# EAGLE board HB-OU-MP3-LED_V1.2 (EAGLE 9.4.2)
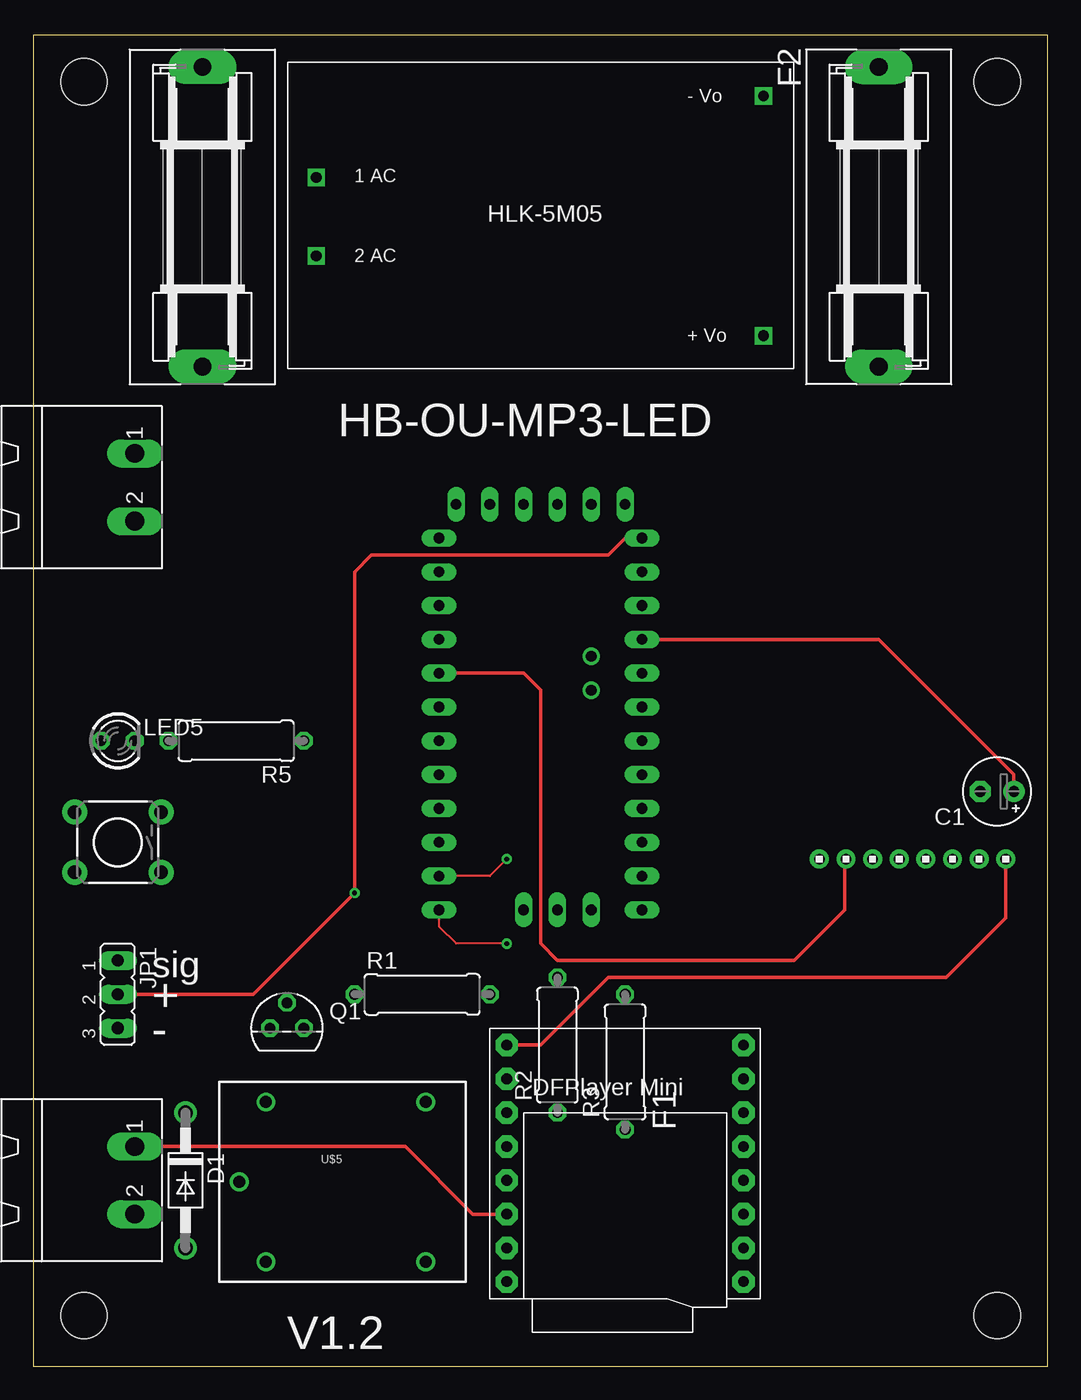
[diagram p0: board, top side]
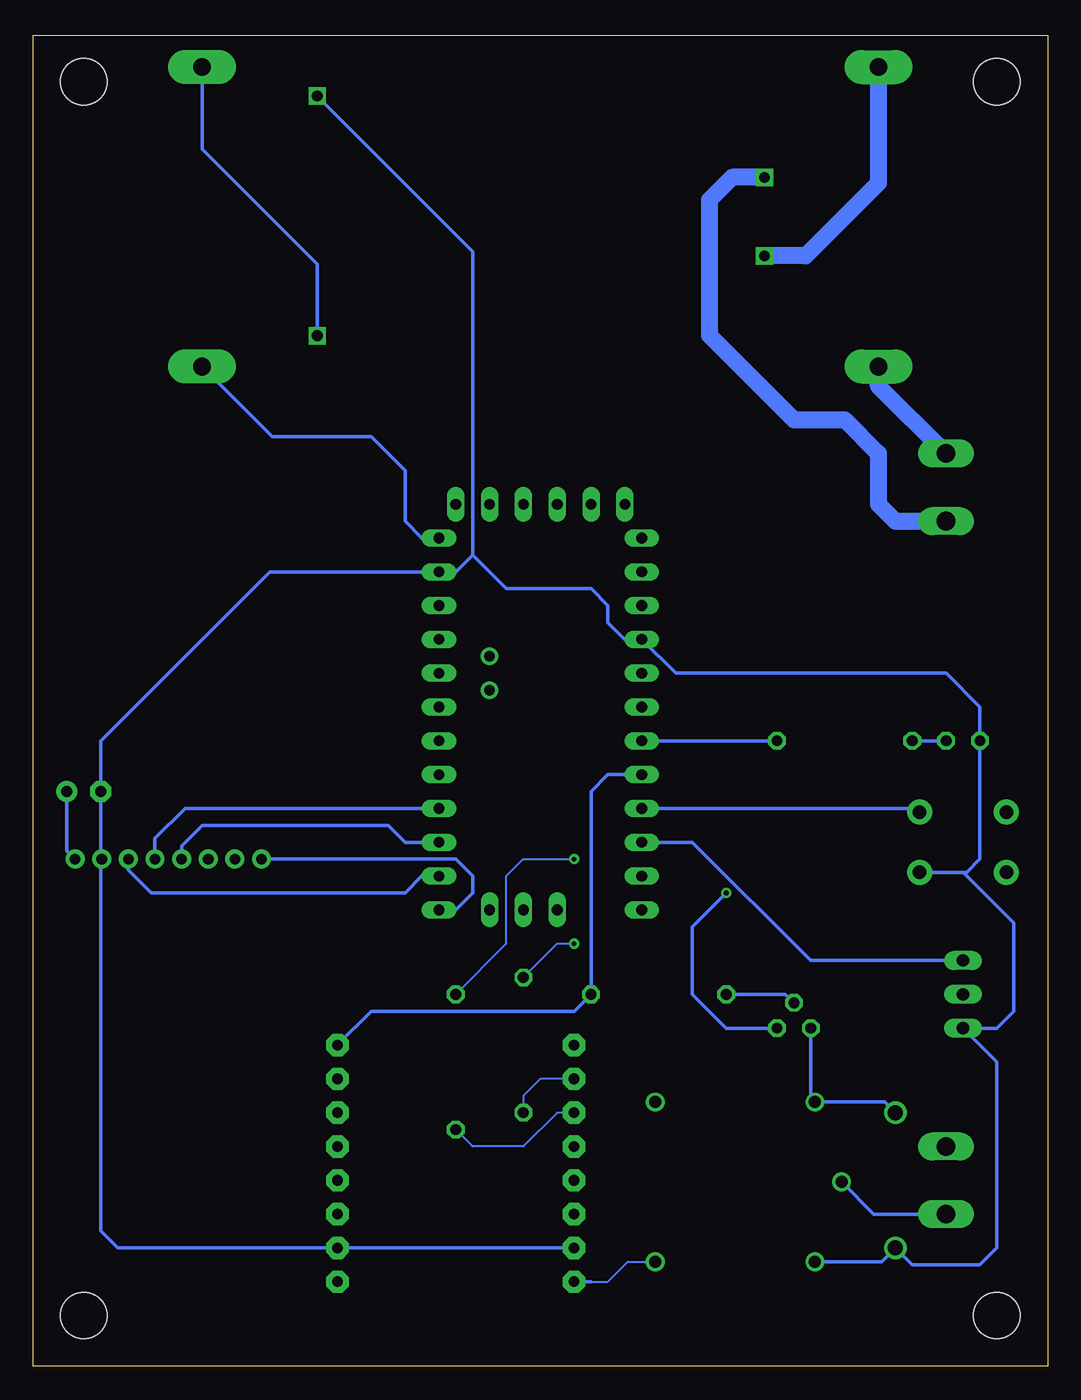
[diagram p1: board, bottom side, seen from below]

Size 76.18 x 100 mm. Coordinates in mm from the lower left corner, seen from the top.
Outline: 0,0 76.18,0 76.18,100 0,100 0,0
Copper layers (1*16): Top 0.035mm / dielectric 1.5mm / Bottom 0.035mm
Design rules "default": minimum track width 6mil, minimum drill 0.35mm, track to track 6mil, track to pad 6mil, pad to pad 6mil, via to via 6mil, smd to smd 6mil, copper to edge 40mil, drill to drill 6mil, minimum pad ring 10mil, minimum via ring 8mil, stop-mask expansion 4mil, vias tented up to drill 0mil, thermal gap 10mil
Holes 3.5 mm at 3.81,96.52 72.39,96.52 3.81,3.81 72.39,3.81

## Footprints (pad centres in the part's own frame; a part is rotated, then mirrored left to right if it is on the bottom)
E2,5-5 = drill 0.813 pad 1.6: + -1.27,0 | drill 0.813 pad 1.6 octagon: - 1.27,0
TACTILE_SWITCH_PTH_6.0MM_KIT = drill 1.016 pad 1.88: 1 -3.251,2.261; 2 3.251,2.261; 3 -3.251,-2.261; 4 3.251,-2.261
DO41-10 = drill 1.118: A 5.08,0; C -5.08,0
SH22,5A = drill 1.321 pad 2.54 long: 1 -11.252,0; 2 11.252,0
JP2 = drill 0.914 long: 1 -2.54,0; 2 0,0; 3 2.54,0
LED3MM = drill 0.813 octagon: A -1.27,0; K 1.27,0
TO92 = drill 0.813 octagon: 1 1.27,0; 2 0,1.905; 3 -1.27,0
0309/10 = drill 0.813 octagon: 1 -5.08,0; 2 5.08,0
1X8 = drill 0.8 pad 1.422: 1 -7,0; 2 -5,0; 3 -3,0; 4 -1,0; 5 1,0; 6 3,0; 7 5,0; 8 7,0
ABK-PRO-MINI = drill 0.8 long: A0 10.16,-3.81; A1 10.16,-6.35; A2 10.16,-8.89; A3 10.16,-11.43; A6 3.81,-21.59; A7 6.35,-21.59; D2 -5.08,-3.81; D3 -5.08,-6.35; D4 -5.08,-8.89; D5 -5.08,-11.43; D6 -5.08,-13.97; D7 -5.08,-16.51; D8 -5.08,-19.05; D9 -5.08,-21.59; D10 10.16,-21.59; D11 10.16,-19.05; D12 10.16,-16.51; D13 10.16,-13.97; DTR 8.89,8.89; GND 10.16,3.81; GND1 -5.08,-1.27; GND2 -3.81,8.89; GND3 -1.27,8.89; GND4 1.27,-21.59; RAW 10.16,6.35; RST 10.16,1.27; RST1 -5.08,1.27; RX1 -5.08,3.81; RX1-1 3.81,8.89; TX0 -5.08,6.35; TX0-1 6.35,8.89; VCC 10.16,-1.27; VCC1 1.27,8.89 | drill 0.8: A4 6.35,-5.08; A5 6.35,-2.54
HLK-5M05 = drill 0.8 square: 1 -16.85,-2.93; 2 -16.85,2.97; 3 16.75,9.07; 4 16.75,-8.93
DFPLAYER = drill 0.8 pad 1.676 octagon: ADKEY1 8.89,-1.27; ADKEY2 8.89,1.27; BUSY 8.89,8.89; DAC_L -8.89,-1.27; DAC_R -8.89,1.27; GND_1 -8.89,-6.35; GND_2 8.89,-6.35; IO1 8.89,-8.89; IO2 8.89,-3.81; RX -8.89,6.35; SPK1 -8.89,-3.81; SPK2 -8.89,-8.89; TX -8.89,3.81; USB+ 8.89,3.81; USB- 8.89,6.35; VCC -8.89,8.89
SRD-05VDC-SL-C = drill 0.9: COIL0 -5.39,-6.12; COIL1 -5.39,5.88; SWCLOSED 6.61,-6.12; SWCOMMON -7.39,-0.12; SWOPEN 6.61,5.88
MSTBA2 = drill 1.397 long: 1 -2.54,5.08; 2 2.54,5.08

## Placement (x,y rotation side)
C1  [E2,5-5]  72.39,43.18 180 top
CONFIG  MOMENTARY-SWITCH-SPST-PTH-6.0MM-KIT  [TACTILE_SWITCH_PTH_6.0MM_KIT]  6.35,39.37 180 top
D1  1N4004  [DO41-10]  11.43,13.97 270 top
F1  [SH22,5A]  12.7,86.36 90 top
F2  [SH22,5A]  63.5,86.36 270 top
JP1  [JP2]  6.35,27.94 270 top
LED5  [LED3MM]  6.35,46.99 0 top
Q1  BC327  [TO92]  19.05,25.4 0 top
R1  10K  [0309/10]  29.21,27.94 0 top
R2  1K  [0309/10]  39.37,24.13 90 top
R3  1K  [0309/10]  44.45,22.86 90 top
R5  470  [0309/10]  15.24,46.99 180 top
U$1  1X8  [1X8]  66.04,38.1 180 top
U$2  ABK-PRO-MINI  [ABK-PRO-MINI]  35.56,55.88 0 top
U$3  5VDC/5W  [HLK-5M05]  38.1,86.36 0 top
U$4  DFPLAYER  [DFPLAYER]  44.45,15.24 0 top
U$5  RELAYPTH  [SRD-05VDC-SL-C]  22.86,13.97 0 top
X1  MSTBA2  [MSTBA2]  2.54,66.04 270 top
X2  MSTBA2  [MSTBA2]  2.54,13.97 270 top

## Library data of the parts
C1 R1-R3 R5 = resistor
CONFIG = SparkFun-Switches; PROD_ID: SWCH-08441; SF_SKU: COM-00097
D1 = diode
F1 F2 = fuse; MPN: 0031.7701.11; OC_FARNELL: unknown; OC_NEWARK: 04F1224
JP1 = jumper
LED5 = led
Q1 = transistor-pnp
U$1 = headers(2mm)
U$2 = Arduino-clone
U$3 = HLK-5M05; SIZE: 23x38(mm)
U$4 = DFPlayer_v1
U$5 = SRD-05VDC-SL-C
X1 X2 = con-phoenix-508; MF: FARNELL; MPN: 1757242; OC_FARNELL: 3705171; OC_NEWARK: 71C4161

## Nets
CSN: U$1.8 U$2.D10
GDO0: U$1.7 U$2.D2
GND: C1.- CONFIG.1 D1.A JP1.3 LED5.A U$1.2 U$2.GND U$2.GND1 U$3.3 U$4.GND_1 U$4.GND_2 U$5.COIL0
N$1: JP1.1 U$2.D7
N$2: CONFIG.3 U$2.D6
N$3: R2.2 U$2.D9
N$4: R3.2 U$2.D8
N$5: R1.2 U$2.D5 U$4.BUSY
N$6: U$4.SPK1 X2.1
N$7: U$4.SPK2 U$5.SWCLOSED
N$8: Q1.2 R1.1
N$9: F1.1 X1.1
N$10: F2.1 U$3.4
N$11: U$3.2 X1.2
N$12: D1.C Q1.3 U$5.COIL1
N$13: U$5.SWCOMMON X2.2
N$14: R2.1 U$4.RX
N$15: R3.1 U$4.TX
N$17: R5.1 U$2.D4
N$18: LED5.K R5.2
N$19: F1.2 U$3.1
RAW: F2.2 JP1.2 Q1.1 U$2.RAW
SCLK: U$1.4 U$2.D13
SI: U$1.3 U$2.D11
SO: U$1.5 U$2.D12
VCC: C1.+ U$1.1 U$2.VCC U$4.VCC

## Tracks (layer width: path | path; a pad name or v marks a point on that pad's centre or on a via)
CSN
  Bottom 0.254: U$2.D10 44.45,34.29 43.18,35.56 43.18,36.83 44.45,38.1 U$1.8
GDO0
  Top 0.254: U$1.7 60.96,38.02 60.96,34.29 57.15,30.48 39.37,30.48 38.1,31.75 38.1,50.8 36.83,52.07 U$2.D2
GND
  Bottom 0.254: CONFIG.1 6.35,37.11 | 6.35,37.11 6.07,37.11 5.08,38.1 LED5.A 5.08,49.53 7.62,52.07 27.94,52.07 U$2.GND1 31.75,54.61 33.02,55.88 33.02,57.15 34.29,58.42 40.64,58.42 43.18,60.96 | 6.35,37.11 2.54,33.3 2.54,26.67 3.81,25.4 JP1.3 3.81,22.86 3.81,8.89 5.08,7.62 10.16,7.62 D1.A 12.47,7.85 U$5.COIL0 | U$3.3 43.18,83.76 43.18,60.96 | 43.18,60.96 44.45,59.69 U$2.GND 58.42,59.69 71.12,46.99 C1.- 71.12,38.18 71.08,38.14 | 71.08,38.14 U$1.2 | 71.08,38.14 71.12,38.1 71.12,10.16 69.85,8.89 U$4.GND_2 U$4.GND_1
N$1
  Bottom 0.254: U$2.D7 26.67,39.37 17.78,30.48 JP1.1
N$2
  Bottom 0.254: CONFIG.3 9.88,41.91 U$2.D6
N$3  (via drill 0.35)
  Top 0.152: v35.56,31.75 31.75,31.75 30.48,33.02 U$2.D9
  Bottom 0.152: R2.2 36.83,31.75 v35.56,31.75
N$4  (via drill 0.35)
  Top 0.152: v35.56,38.1 34.29,36.83 U$2.D8
  Bottom 0.152: R3.2 40.64,31.75 40.64,36.83 39.37,38.1 v35.56,38.1
N$5
  Bottom 0.254: U$2.D5 33.02,44.45 34.29,43.18 R1.2 35.56,26.67 50.8,26.67 U$4.BUSY
N$6
  Top 0.254: U$4.SPK1 33.02,11.43 27.94,16.51 X2.1
N$7
  Bottom 0.152: 34.29,6.35 33.02,6.35 31.52,7.85 U$5.SWCLOSED
  Bottom 0.254: U$4.SPK2 34.29,6.35
N$8
  Bottom 0.254: Q1.2 19.68,27.94 R1.1
N$9
  Bottom 1.27: X1.1 12.7,73.66 F1.1
N$10
  Bottom 0.254: U$3.4 54.85,82.79 63.5,91.44 F2.1
N$11
  Bottom 1.27: U$3.2 23.7,89.33 25.4,87.63 25.4,77.47 19.05,71.12 15.24,71.12 12.7,68.58 12.7,64.77 11.43,63.5 X1.2
N$12
  Bottom 0.254: D1.C 12.23,19.85 U$5.COIL1 17.78,20.16 Q1.3
N$13
  Bottom 0.254: X2.2 13.05,11.43 U$5.SWCOMMON
N$14
  Bottom 0.152: U$4.RX 38.1,21.59 39.37,20.32 R2.1
N$15
  Bottom 0.152: U$4.TX 36.83,19.05 39.37,16.51 43.18,16.51 R3.1
N$17
  Bottom 0.254: R5.1 U$2.D4
N$18
  Bottom 0.254: LED5.K R5.2
N$19
  Bottom 1.27: F1.2 12.7,88.9 18.17,83.43 U$3.1
RAW  (via drill 0.35)
  Top 0.254: JP1.2 16.51,27.94 v24.13,35.56 24.13,59.69 25.4,60.96 43.18,60.96 44.45,62.23 U$2.RAW
  Bottom 0.254: F2.2 58.24,69.85 50.8,69.85 48.26,67.31 48.26,63.5 46.99,62.23 U$2.RAW | Q1.1 24.13,25.4 26.67,27.94 26.67,33.02 v24.13,35.56
SCLK
  Bottom 0.254: U$2.D13 64.77,41.91 67.04,39.64 U$1.4
SI
  Bottom 0.254: U$2.D11 46.99,36.83 48.26,35.56 67.31,35.56 69.04,37.29 U$1.3
SO
  Bottom 0.254: U$2.D12 48.26,39.37 49.53,40.64 63.5,40.64 65.04,39.1 U$1.5
VCC
  Top 0.254: U$1.1 73.04,33.67 68.58,29.21 43.18,29.21 38.1,24.13 U$4.VCC | U$2.VCC 63.5,54.61 73.66,44.45 C1.+
  Bottom 0.254: C1.+ 73.66,38.72 U$1.1

## Text on the board
tNames: HB-OU-MP3-LED | sig | + | - | V1.2